# Altium PCB PCB1.PcbDoc
Units mil, origin at the board's own origin, x right, y up, seen from the top; angles counter-clockwise.
Board outline 1155 x 1030 mil, 2 copper layers (Top Layer, Bottom Layer); 13 components, 14 nets, 54 pads, 0 vias.
Unrouted connection lines stored in the file: 1.
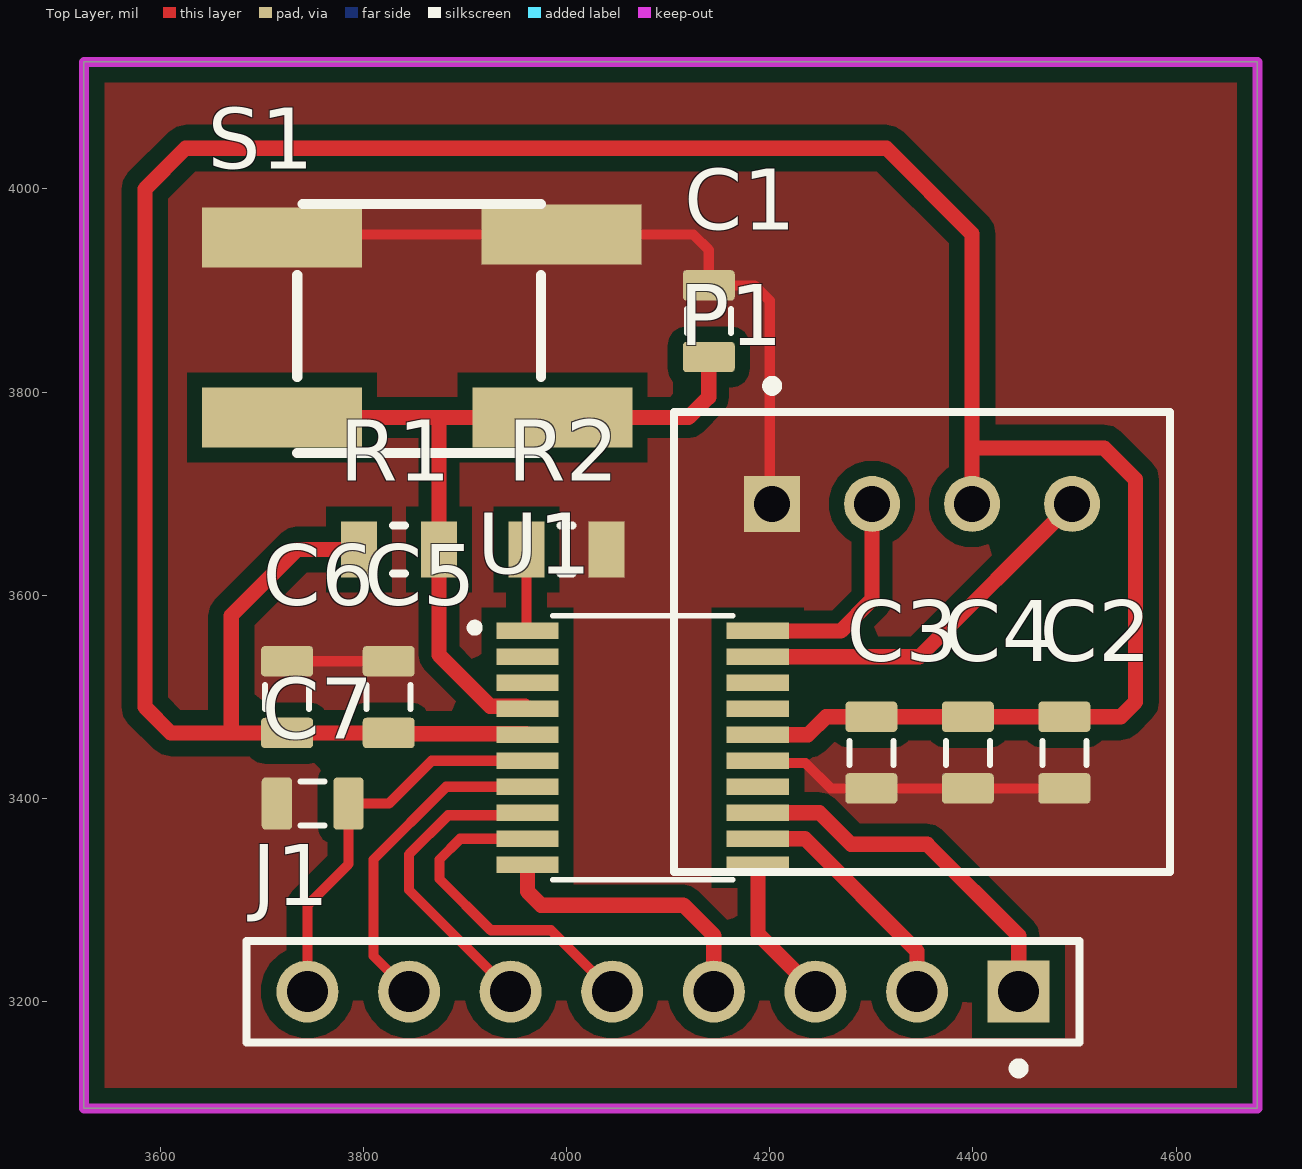
[diagram p0: Top Layer view]
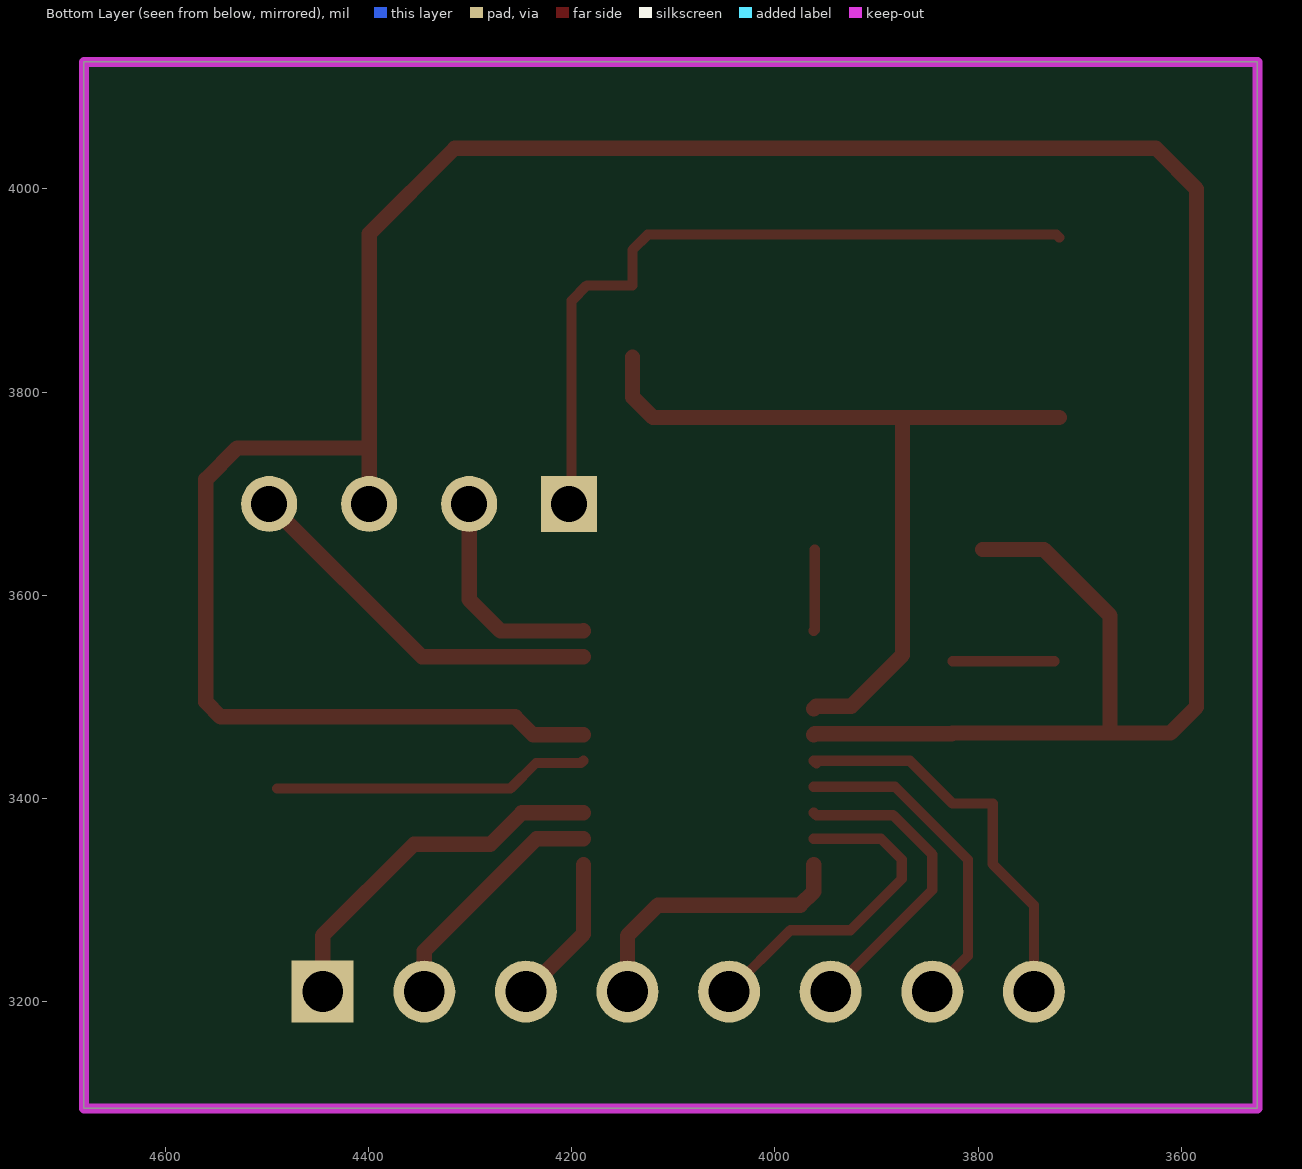
[diagram p1: Bottom Layer view, seen from below]
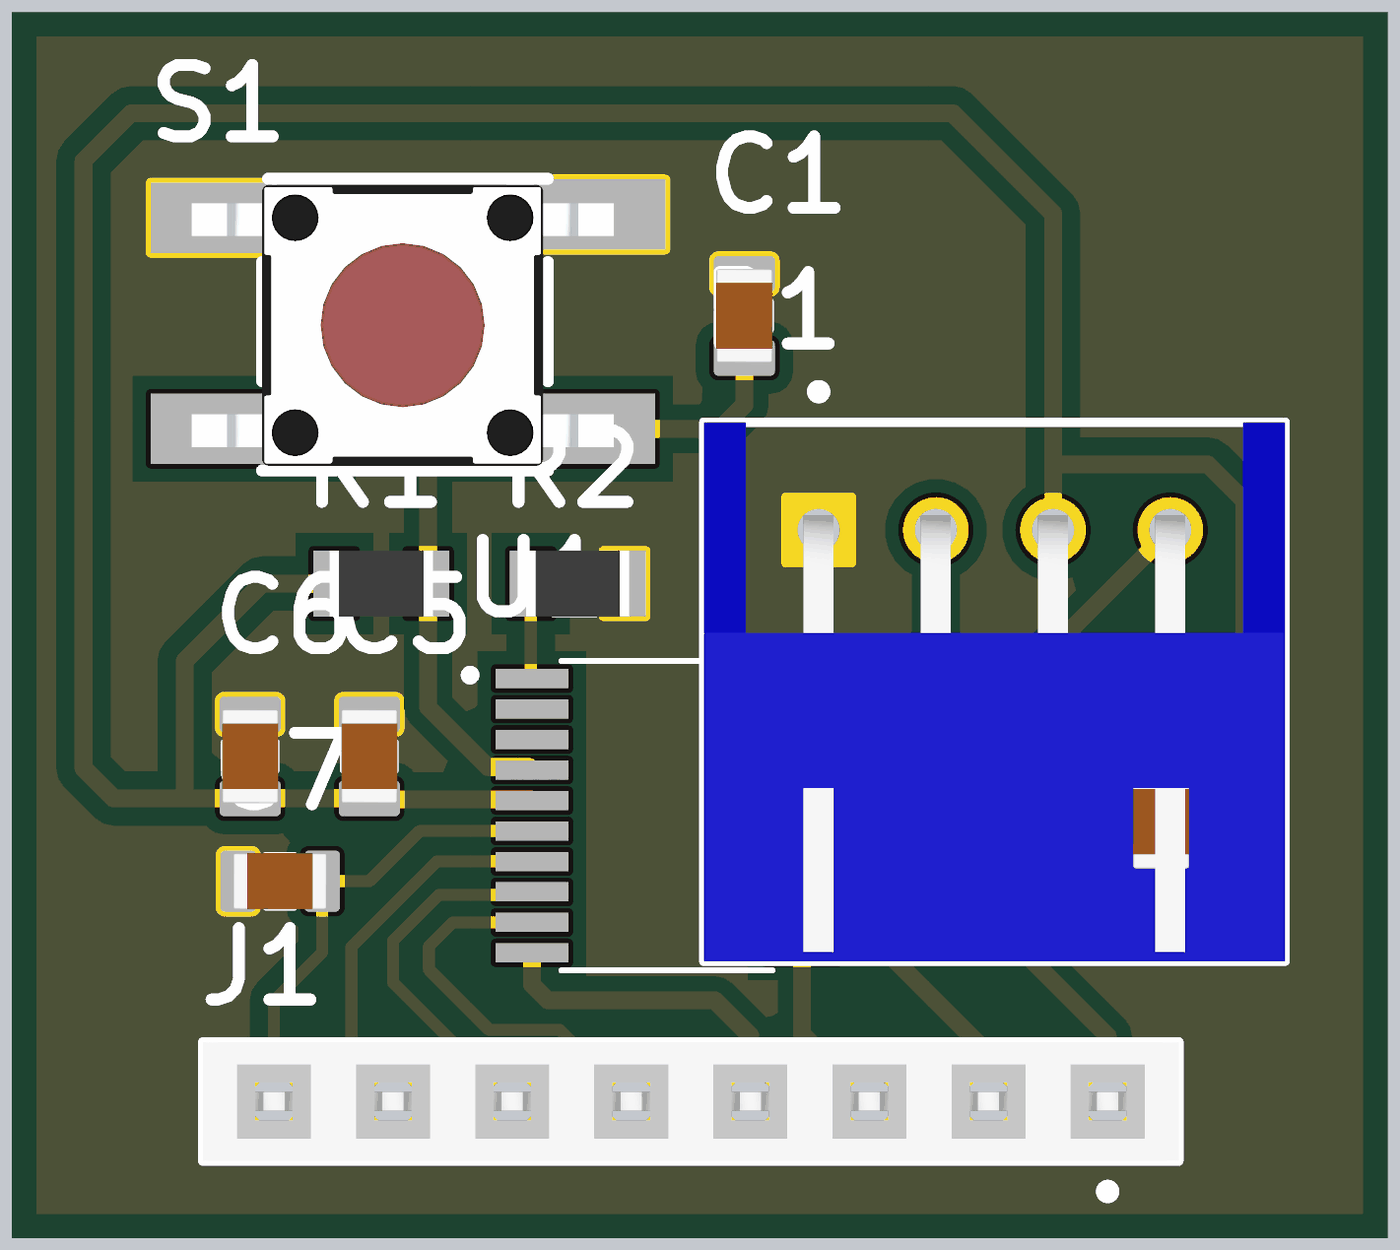
[diagram p2: 3D render of the assembled board from above, using the file's embedded part models]

## Layer stack, top to bottom
Top Solder: solder mask 0.4, Solder Resist, Dk 3.5
Top Layer: signal copper 1.4
Dielectric 1: dielectric 12.6, FR-4, Dk 4.8
Bottom Layer: signal copper 1.4
Bottom Solder: solder mask 0.4, Solder Resist, Dk 3.5

## Board outline
3525,3095 4680,3095 4680,4125 3525,4125

## Design rules (kind name [scope] priority, off if disabled: settings)
Clearance Clearance_3 [All] p1: gap=15 ignorepadtopadclearanceinfootprint=FALSE except(5: Arc-SMDPad Track-SMDPad SMDPad-SMDPad SMDPad-Text)
Clearance Clearance_1 [OnMid vs OnMid] p2: gap=10 ignorepadtopadclearanceinfootprint=FALSE sourcerule=39 cellrowname=All cellrowtype=0 cellcolname=All cellcoltype=0 innerlayers=TRUE
Clearance Clearance_2 [(ExistsOnLayer('Top Layer') Or ExistsOnLayer('Bottom Layer')) vs (ExistsOnLayer('Top Layer') Or ExistsOnLayer('Bottom Layer'))] p3: gap=10 ignorepadtopadclearanceinfootprint=FALSE sourcerule=39 cellrowname=All cellrowtype=0 cellcolname=All cellcoltype=0 outerlayers=TRUE
Clearance [All] p4: gap=10 ignorepadtopadclearanceinfootprint=FALSE ismatrix=TRUE
PolygonConnect [All] p1: connectstyle=Direct reliefconductorwidth=10 reliefentries=4 polygonreliefangle="90 Angle" airgapwidth=10
RoutingVias [All] p1: holewidth=28 width=50 viastyle="Through Hole" minholewidth=28 minwidth=50 maxholewidth=28 maxwidth=50
SolderMaskExpansion [All] p1: expansion=4 istentingtop=FALSE
SupplyNets "Schematic Supply Nets_1" [InNet('+3V3')] p1: voltage=0.000
SupplyNets "Schematic Supply Nets" [InNet('GND')] p2: voltage=0.000
Width [All] p1: maxlimit=10 minlimit=10 preferedwidth=10
30 further rules are at their usual default settings.

## Components (designator, comment, footprint, x,y, rotation, side; value= is the part's Value field where it differs from the comment)
C1 "Capacitor 100 nF +/-10% 50 V 0805" CAPC0805(2012)145_L 4140,3870 r90 top value=100nF
C2 "Capacitor 100 nF +/-10% 50 V 0805" CAPC0805(2012)145_L 4490,3445 r270 top value=4.7uF
C3 "Capacitor 100 nF +/-10% 50 V 0805" CAPC0805(2012)145_L 4300,3445 r270 top value=100nF
C4 "Capacitor 100 nF +/-10% 50 V 0805" CAPC0805(2012)145_L 4395,3445 r270 top value=100nF
C5 "Capacitor 100 nF +/-10% 50 V 0805" CAPC0805(2012)145_L 3825,3500 r90 top value=100nF
C6 "Capacitor 100 nF +/-10% 50 V 0805" CAPC0805(2012)145_L 3725,3500 r90 top value=100nF
C7 "Capacitor 100 nF +/-10% 50 V 0805" CAPC0805(2012)145_L 3750,3395 r180 top value=10nF
J1 "PPPC081LFBN-RC" SLIN-PPPC081LFBN-RC_V 4095,3210 r180 top
P1 "S4B-XH-A(LF)(SN)" JST-S4B-XH-A(LF)(SN)_V 4350,3690 r0 top
R1 "00080548721" RES_0805 3835,3645 r0 top value=10k
R2 "00080548721" RES_0805 4000,3645 r0 top value=10k
S1 "Tactile Switch-6x6" "Tactile Switch-6x6-Footprint" 3855,3860 r0 top
U1 "STM32F030F4P6" SOP65P640X120-20N 4075,3450 r0 top

## Footprints (in the part's own frame and the unit in brackets; to place one, negate y for a bottom-side part, rotate by r counter-clockwise, add the part's x,y. Pads: shape width x height; smd on the part's side, far side on the other; paste and mask are expansions set on the pad)
CAPC0805(2012)145_L [mm] "Chip Capacitor, Body 2.0x1.2mm, Height 1.45mm, IPC High Density"
  rrect25% 0.76x1.3 smd: 1(-0.9,0) 2(0.89,0)
  silkscreen extent -0.3,-0.55 0.3,0.55, body extent -1,-0.6 1,0.6, height 1.45
JST-S4B-XH-A(LF)(SN)_V [mm] "Header, 4-Leads, Body 12.4x11.5mm, Pitch 2.5mm"
  rect 1.4x1.4 hole 0.9: 1(-3.75,0)
  round 1.4 hole 0.9: 2(-1.25,0) 3(1.25,0) 4(3.75,0)
  silkscreen extent -6.2,-9.2 6.2,3.08, body extent -6.2,-9.2 6.2,2.3, height 6.15
RES_0805 [mm] "Chip Resistor, 2-Leads, Body 2.05x1.25mm, IPC Medium Density"
  rect 0.9x1.4 smd: 1(-1,0) 2(1,0)
  silkscreen extent -0.15,-0.6 0.15,0.6, body extent -1.1,-0.7 1.1,0.7, height 0.5
SLIN-PPPC081LFBN-RC_V [mm] "THD, 8-Leads, Body 20.82x2.54mm, Pitch 2.54mm"
  rect 1.55x1.55 hole 1.02: 1(-8.89,0)
  round 1.55 hole 1.02: 2(-6.35,0) 3(-3.81,0) 4(-1.27,0) 5(1.27,0) 6(3.81,0) 7(6.35,0) 8(8.89,0)
  silkscreen extent -10.41,-1.27 10.41,2.04, body extent -10.41,-1.27 10.41,1.27, height 8.5
SOP65P640X120-20N [mm]
  rect 1.56x0.41 smd: 1(-2.88,2.925) 2(-2.88,2.275) 3(-2.88,1.625) 4(-2.88,0.975) 5(-2.88,0.325) 6(-2.88,-0.325) 7(-2.88,-0.975) 8(-2.88,-1.625) 9(-2.88,-2.275) 10(-2.88,-2.925) 11(2.88,-2.925) 12(2.88,-2.275) 13(2.88,-1.625) 14(2.88,-0.975) 15(2.88,-0.325) 16(2.88,0.325) 17(2.88,0.975) 18(2.88,1.625) 19(2.88,2.275) 20(2.88,2.925)
  silkscreen extent -4.3,-3.3 2.25,3.3
"Tactile Switch-6x6-Footprint" [mm]
  rect 4x1.5 smd: 1(-3.429,2.341) 2(3.556,2.413) 3(3.333,-2.159) 4(-3.429,-2.159)
  silkscreen extent -3.05,-3.05 3.05,3.17, body extent -4.55,-2.95 4.45,3.05, height 13

## Part data
C1 C2 C3 C4 C5 C6 C7: library part CMP-001-00018-10, "Chip Capacitor, 100 nF, +/- 10%, 50 V, 0805 (2012 Metric)", Capacitor Type=Ceramic, Case/Package=0805, Max Operating Temperature=125°C, Min Operating Temperature=-55°C, Tolerance=10%, Voltage Rating=50V, Mounting Technology=SM, Pins=2, RoHS Compliant=True, Supplier Locally Name=Thegioiic, Supplier Locally URL=https://www.thegioiic.com/tu-gom-0805-100nf-0-1uf-50v
J1: library part CMP-002-00028-4, "Female Header, Pitch 2.54 mm, 1 x 8 Position, Height 8.5 mm, Tail Length 3.2 mm, -40 to 105 degC, RoHS, Bulk", Manufacturer=Sullins, Max Operating Temperature=105°C, Min Operating Temperature=-40°C, Package Description="Female Header, Pitch 2.54 mm, 1 x 8 Position, Height 8.5 mm, Tail Length 3.2 mm", Case/Package=PPPC081LFBN-RC, Connector Type=Header, Datasheet URL=http://sullinscorp.com/catalogs/101_PAGE114-115_.100_FEMALE_HDR.pdf, Datasheet Version=Jan-15, Gender=Female, Mounting Technology=TH, Package Reference=PPPC081LFBN-RC, RoHS Compliant=Unknown
P1: library part CMP-002-00034-4, "Male Header, Pitch 2.5 mm, 1 x 4 Position, Height 6.1 mm, Tail Length 3.4 mm, -25 to 85 degC, RoHS, Bulk", Manufacturer=JST, Max Operating Temperature=85°C, Min Operating Temperature=-25°C, Package Description="XH Series Disconnectable Crimp Style Connector, Pitch 2.5 mm, 1 x 4 Position, Height 6.1 mm, Tail Length 3.4 mm", Case/Package=S4B-XH-A(LF)(SN), Connector Type=Header, Datasheet URL=http://www.jst-mfg.com/product/pdf/eng/eXH.pdf, Datasheet Version=May-16, Gender=Male, Manufacturer URL=http://www.jst.com/home2.html, Mounting Technology=TH, Package Reference=S4B-XH-A(LF)(SN), RoHS Compliant=Unknown
R1 R2: library part CMP-009-00606-2, "RES, size 0805, 48.7 KOhm, 1/8W, 1%", Case/Package=0805, LCSC Part #=N/A, Operating Temperature Max="+ 85 C", Operating Temperature Min="- 40 C", Rated Power="1/8 W", Supplier 1 Part Number=652-CR0805FX-4872ELF, Supplier 2 Part Number=P48.7KCDKR-ND, Supplier 3 Part Number=OEM, Tolerance=1%, Component Type=Standard, ComponentLink1Description=Datasheet, ComponentLink1URL=N/A, Design Item ID=00080548721, Manufacturer=N/A, Manufacturer Part Number=N/A, Mount=SMD/SMT, Packaging="Tape and Reel", Pins=2, Source=Resistor_0805.SchLib, Supplier 1 URL=https://www.mouser.vn/ProductDetail/Bourns/CR0805-FX-4872ELF?qs=sGAEpiMZZMtlubZbdhIBIL%252BKkaYz7rs3OXEDnL6C198%3D, Supplier 2 URL=https://www.digikey.com/en/products/detail/panasonic-electronic-components/ERJ-6ENF4872V/111609, Supplier 3 URL=N/A
S1: library part CMP-011-00014-2, "Tactile Switch 6x6mm"
U1: "MCU 32-bit STM32F ARM Cortex M0 RISC 16KB Flash 2.5V/3.3V 20-Pin TSSOP Tray", Package=None, Availability=Unavailable, MP=STM32F030F4P6, Price=None

## Nets (pads, with @x,y where several pads share a name; then routed paths per layer and width w, separated by ;. In a path a pad name is that pad's centre, name@x,y a point inside that pad or via, vN(x,y) a via of type N, cw(c..) or ccw(c..) an arc to the next point about the centre after c; other vN are vias at no path point)
+3V3: C2.1 C3.1 C4.1 C5.1 C6.1 P1.3 R1.1 U1.5 U1.16 | length 3075.2
  Top Layer w15: R1.1 3735,3645 3670,3580 3670,3465 3670.43,3464.57 ; U1.5 3960.73,3463.68 3825.89,3463.68 C5.1 3670.43,3464.57 ; U1.16 4237.8,3462.8 4255.43,3480.43 C3.1 C4.1 C2.1 4545.43,3480.43 4560,3495 4560,3714.14 4529.14,3745 4399.21,3745 ; P1.3 4399.21,3745 ; 3670.43,3464.57 3610.43,3464.57 3585,3490 3585,4000 3625,4040 4315,4040 4399.21,3955.79 4399.21,3745
GND: C1.2 C2.2 C3.2 C4.2 C5.2 C6.2 C7.2 P1.1 R2.2 S1.1 S1.2 U1.15 | length 1142.5
  Top Layer w10: S1.1 3722.83,3955 S1.2 4125,3955 4140,3940 C1.2 4184.96,3905.04 4200,3890 4200,3692.36 P1.1 ; C6.2 C5.2 ; U1.15 4190.59,3435 4235,3435 4260.04,3409.96 C3.2 C4.2 C2.2
NetP1_2: P1.2 U1.20 | length 219.4
  Top Layer w15: U1.20 4188.54,3565 4270,3565 4300.79,3595.79 P1.2
NetP1_4: P1.4 U1.19 | length 371.6
  Top Layer w15: U1.19 4347.2,3539.57 P1.4
NetR2_1: R2.1 U1.1 | length 80.3
  Top Layer w10: R2.1 3960.63,3566.14 U1.1
NRST: C1.1 R1.2 S1.3 S1.4 U1.4 | length 811
  Top Layer w15: S1.4 3875,3775 ; U1.4 3959.09,3490.91 3924.69,3490.91 3874.37,3541.23 R1.2 3874.37,3774.37 3875,3775 ; C1.1 4140,3795 4120,3775 S1.3 3875,3775
PA0: C7.1 J1.8 U1.6 | length 399
  Top Layer w10: J1.8 3745,3295 3785.43,3335.43 C7.1 3825,3395 3867.2,3437.2 U1.6 U1.6@3959.09,3434.69
PA1: J1.7 U1.7 | length 325.8
  Top Layer w10: J1.7 3810,3245 3810,3340 3881.61,3411.61 U1.7
PA2: J1.6 U1.8 | length 310
  Top Layer w10: J1.6 3845,3310 3845,3345 3883.5,3383.5 3959.09,3383.5 U1.8
PA3: J1.5 U1.9 | length 330.1
  Top Layer w10: U1.9 3895.43,3360.43 3875,3340 3875,3320.86 3925.55,3270.31 3984.69,3270.31 J1.5
PA4: J1.4 U1.10 | length 282.8
  Top Layer w15: U1.10 3961.61,3308.39 3975,3295 4115,3295 4145,3265 J1.4
PA5: J1.3 U1.11 | length 148.3
  Top Layer w15: U1.11 4188.39,3266.61 J1.3
PA6: J1.2 U1.12 | length 242.4
  Top Layer w15: U1.12 4234.57,3360.43 4345,3250 J1.2
PA7: J1.1 U1.13 | length 361.7
  Top Layer w15: U1.13 4248.98,3386.02 4280,3355 4355,3355 4445,3265 J1.1
pads on no net: U1.2 U1.3 U1.14 U1.17 U1.18

## Polygon pours and split planes (outlines as drawn)
GND on Top Layer "GND_L01_P000" (solid, remove dead copper, pour order 0): 3525,3095 4680,3095 4680,4125 3525,4125

## Keep-outs
Keep-Out Layer:
  the board outline again, w10